# EAGLE board CT_schematic (EAGLE 7.6.0)

Size 100 x 80 mm. Coordinates in mm from the lower left corner, seen from the top.
Outline: 0,0 100,0 100,80 0,80 0,0
Copper layers (1*16): Top 0.035mm / dielectric 1.5mm / Bottom 0.035mm
Design rules "default": minimum track width 10mil, minimum drill 24mil, track to track 8mil, track to pad 8mil, pad to pad 8mil, via to via 8mil, smd to smd 8mil, copper to edge 40mil, drill to drill 8mil, minimum pad ring 10mil, minimum via ring 8mil, stop-mask expansion 4mil, vias tented up to drill 0mil, thermal gap 10mil

## Footprints (pad centres in the part's own frame; a part is rotated, then mirrored left to right if it is on the bottom)
C0603 = smd 0.8 x 0.8: 1 -0.762,0; 2 0.762,0
C0402 = smd 0.5 x 0.5: 1 -0.508,0; 2 0.508,0
C1206 = smd 1.3 x 1.6: 1 -1.524,0; 2 1.524,0
C1210 = smd 1.2 x 2.5: 1 -1.524,0; 2 1.524,0
EXV-9H = smd 3.505 x 1.676: 1 -2.857,0; 2 2.857,0
L0603 = smd 0.8 x 0.8: 1 -0.762,0; 2 0.762,0
PJ-037B_PACKAGE = drill 3.7 square: 1 12,0 | drill 3.2 square: 2 6,0
R0603 = smd 0.8 x 0.8: 1 -0.762,0; 2 0.762,0
UFQFPN48 = smd 0.559 x 0.305: 1 -3.375,2.751; 2 -3.375,2.251; 3 -3.375,1.75; 4 -3.375,1.25; 5 -3.375,0.75; 6 -3.375,0.25; 7 -3.375,-0.25; 8 -3.375,-0.75; 9 -3.375,-1.25; 10 -3.375,-1.75; 11 -3.375,-2.251; 12 -3.375,-2.751; 25 3.375,-2.751; 26 3.375,-2.251; 27 3.375,-1.75; 28 3.375,-1.25; 29 3.375,-0.75; 30 3.375,-0.25; 31 3.375,0.25; 32 3.375,0.75; 33 3.375,1.25; 34 3.375,1.75; 35 3.375,2.251; 36 3.375,2.751 | smd 0.305 x 0.559: 13 -2.751,-3.375; 14 -2.251,-3.375; 15 -1.75,-3.375; 16 -1.25,-3.375; 17 -0.75,-3.375; 18 -0.25,-3.375; 19 0.25,-3.375; 20 0.75,-3.375; 21 1.25,-3.375; 22 1.75,-3.375; 23 2.251,-3.375; 24 2.751,-3.375; 37 2.751,3.375; 38 2.251,3.375; 39 1.75,3.375; 40 1.25,3.375; 41 0.75,3.375; 42 0.25,3.375; 43 -0.25,3.375; 44 -0.75,3.375; 45 -1.25,3.375; 46 -1.75,3.375; 47 -2.251,3.375; 48 -2.751,3.375 | smd 5.588 x 5.588: 49 0,0
SSOP-28 = smd 1.5 x 0.4: 1 -3.625,4.225; 2 -3.625,3.575; 3 -3.625,2.925; 4 -3.625,2.275; 5 -3.625,1.625; 6 -3.625,0.975; 7 -3.625,0.325; 8 -3.625,-0.325; 9 -3.625,-0.975; 10 -3.625,-1.625; 11 -3.625,-2.275; 12 -3.625,-2.925; 13 -3.625,-3.575; 14 -3.625,-4.225; 15 3.625,-4.225; 16 3.625,-3.575; 17 3.625,-2.925; 18 3.625,-2.275; 19 3.625,-1.625; 20 3.625,-0.975; 21 3.625,-0.325; 22 3.625,0.325; 23 3.625,0.975; 24 3.625,1.625; 25 3.625,2.275; 26 3.625,2.925; 27 3.625,3.575; 28 3.625,4.225
182-009-MALE = drill 1.194 pad 1.524 octagon: 1 -5.537,10.923; 2 -2.769,10.923; 3 0,10.923; 4 2.769,10.923; 5 5.537,10.923; 6 -4.153,8.08; 7 -1.384,8.08; 8 1.384,8.08; 9 4.153,8.08 | hole 3.048: -12.446,9.501; 12.446,9.501
ASEK = smd 1.4 x 1: 1 -1.1,-0.8; 2 1.1,-0.8; 3 1.1,0.8; 4 -1.1,0.8
ASFL1 = smd 1.7 x 1.5: 1 -1.27,-1.1; 2 1.27,-1.1; 3 1.27,1.1; 4 -1.27,1.1
WSON-8 = smd 0.3 x 0.6: 1 -0.75,0; 2 0.05,0; 3 0.85,0; 4 1.65,0; 5 1.65,3.8; 6 0.85,3.8; 7 0.05,3.8; 8 -0.75,3.8 | smd 3 x 2.6: PAD 0.45,1.9
SON-6 = smd 0.55 x 0.3: 1 -0.355,0.5 | smd 0.52 x 0.3: 2 -0.37,0; 3 -0.37,-0.5; 4 0.37,-0.5; 5 0.37,0; 6 0.37,0.5
SW_4-1437565-2 = smd 1.4 x 2.1: 1 -2.23,4.55; 2 -2.23,-4.55; 3 2.23,4.55; 4 2.23,-4.55
LGM67K-G1J2-24-Z = smd 0.8 x 1.4: A -2,0; C 0,0
NC7SZ125M5X = smd 1.3 x 0.7: 1 -1.3,0.95; 2 -1.3,0; 3 -1.3,-0.95; 4 1.3,-0.95; 5 1.3,0.95
DUMMY_PACKAGE_100 = drill 0.3: 1 0,-1; 2 1.5,-1; 3 3,-1

## Placement (x,y rotation side)
C1  1e-06  [C0603]  -58.42,55.88 0 top  (outside the outline)
C2  1e-07  [C0603]  -62.23,55.88 0 top  (outside the outline)
C3  1e-07  [C0603]  -66.04,55.88 0 top  (outside the outline)
C4  1e-07  [C0603]  -15.24,60.96 0 top  (outside the outline)
C5  4.7e-06  [C0603]  -54.61,55.88 0 top  (outside the outline)
C6  1e-07  [C0603]  -19.05,60.96 0 top  (outside the outline)
C7  1e-08  [C0603]  -22.86,60.96 0 top  (outside the outline)
C8  1e-06  [C0603]  -26.67,60.96 0 top  (outside the outline)
C9  1e-07  [C0402]  -57.15,60.96 0 top  (outside the outline)
C10  1e-07  [C0402]  -60.96,60.96 0 top  (outside the outline)
C11  1e-07  [C0402]  -64.77,60.96 0 top  (outside the outline)
C12  1e-07  [C0402]  -15.24,66.04 0 top  (outside the outline)
C13  1e-07  [C0402]  -19.05,66.04 0 top  (outside the outline)
C14  1e-08  [C0402]  -22.86,66.04 0 top  (outside the outline)
C15  1e-08  [C0402]  -26.67,66.04 0 top  (outside the outline)
C16  1e-08  [C0402]  -30.48,66.04 0 top  (outside the outline)
C17  1e-05  [C1206]  -57.15,48.26 0 top  (outside the outline)
C18  1e-05  [C1210]  -50.8,48.26 0 top  (outside the outline)
C19  1e-07  [C0402]  -34.29,66.04 0 top  (outside the outline)
C20  0.0001  [EXV-9H]  -17.78,49.53 0 top  (outside the outline)
C21  0.0001  [EXV-9H]  -29.21,49.53 0 top  (outside the outline)
C22  1e-08  [C0402]  -38.1,66.04 0 top  (outside the outline)
F1  240.0  [L0603]  -30.48,60.96 0 top  (outside the outline)
J1  PJ-037B  [PJ-037B_PACKAGE]  -27.94,29.21 0 top  (outside the outline)
R1  10000.0  [R0603]  -35.56,55.88 0 top  (outside the outline)
R2  1000.0  [R0603]  -34.29,60.96 0 top  (outside the outline)
R3  1600.5  [R0603]  -38.1,60.96 0 top  (outside the outline)
R4  4700.0  [R0603]  -41.91,60.96 0 top  (outside the outline)
R5  10000.0  [R0603]  -40.64,55.88 0 top  (outside the outline)
R6  100000.0  [R0603]  -15.24,55.88 0 top  (outside the outline)
R7  100000.0  [R0603]  -20.32,55.88 0 top  (outside the outline)
R8  2231.0  [R0603]  -45.72,60.96 0 top  (outside the outline)
R9  1000.0  [R0603]  -49.53,60.96 0 top  (outside the outline)
R10  10000.0  [R0603]  -45.72,55.88 0 top  (outside the outline)
R11  10000.0  [R0603]  -50.8,55.88 0 top  (outside the outline)
R12  9100.0  [R0603]  -53.34,60.96 0 top  (outside the outline)
R13  680000.0  [R0603]  -25.4,55.88 0 top  (outside the outline)
R14  120000.0  [R0603]  -30.48,55.88 0 top  (outside the outline)
U1  stm32f051c4u7  [UFQFPN48]  -17.78,40.64 0 top  (outside the outline)
U2  ST3241EBPR  [SSOP-28]  -58.42,7.62 0 top  (outside the outline)
U3  182-009-113R531  [182-009-MALE]  -36.83,6.35 0 top  (outside the outline)
U4  ASEK-32.768KHz-ECST  [ASEK]  -57.15,40.64 0 top  (outside the outline)
U5  ASFL1-25MHZ-NCS  [ASFL1]  -36.83,40.64 0 top  (outside the outline)
U6  LP3878SDX-ADJ/NOPB  [WSON-8]  -66.04,25.4 0 top  (outside the outline)
U7  TPS3895ADRYR  [SON-6]  -46.99,64.77 0 top  (outside the outline)
U8  4-1437565-2  [SW_4-1437565-2]  -44.45,27.94 0 top  (outside the outline)
U9  Q65110A2395  [LGM67K-G1J2-24-Z]  -39.37,48.26 0 top  (outside the outline)
U10  nc7sz125m5x  [NC7SZ125M5X]  -62.23,46.99 0 top  (outside the outline)
U11  Dummy  [DUMMY_PACKAGE_100]  -44.45,66.04 0 top  (outside the outline)

## Library data of the parts
C1-C22 F1 J1 R1-R14 U1-U11 = circuit_tree

## Nets
CLK_U1_3: U1.3 U4.3
CLK_U1_5: U1.5 U5.3
GND: C1.2 C2.2 C3.2 C4.2 C5.2 C6.2 C7.2 C8.2 C9.2 C12.2 C13.2 C14.2 C15.2 C16.2 C17.2 C18.2 C19.2 C20.2 C21.2 C22.2 J1.2 R2.2 R5.2 R9.2 R12.2 R14.2 U1.8 U1.23 U1.47 U1.49 U2.23 U2.25 U3.5 U4.2 U5.2 U6.3 U6.PAD U7.2 U9.C U10.1 U10.3 U11.1
NET_U1_7: R4.1 U1.7 U10.4
NET_U1_9: C7.1 C8.1 F1.1 U1.9
NET_U1_44: R5.1 U1.44
NET_U1_45: R3.1 U1.45 U9.A
NET_U1_46: R1.1 U1.46 U8.3 U8.4
NET_U2_1: C11.1 U2.1
NET_U2_2: C11.2 U2.2
NET_U2_3: C13.1 U2.3
NET_U2_22: R6.1 U2.22
NET_U2_24: C10.2 U2.24
NET_U2_27: C12.1 U2.27
NET_U2_28: C10.1 U2.28
NET_U3_2: U2.4 U3.2
NET_U3_3: U2.9 U3.3
NET_U3_7: U2.5 U3.7
NET_U3_8: U2.10 U3.8
NET_U6_1: C16.1 U6.1
NET_U6_6: R8.2 R9.1 U6.6
NET_U6_8: R7.1 U6.8
NET_U7_1: R11.1 R12.1 U7.1
NET_U7_3: R13.2 R14.1 U7.3
NET_U7_4: R10.1 U7.4 U10.2
NET_U8_1: R2.1 U8.1 U8.2
PROC_ADC_IN0: U1.10 U11.2
PROC_ADC_IN1: U1.11 U11.3
PROC_USART1_CTS: U1.32 U2.13
PROC_USART1_RTS: U1.33 U2.18
PROC_USART1_RX: U1.31 U2.19
PROC_USART1_TX: U1.30 U2.14
VCC_S1_10V4: C17.1 C20.1 C21.1 J1.1 R7.2 U6.4
VCC_TIER1_3V3: C1.1 C2.1 C3.1 C4.1 C5.1 C6.1 C9.1 C14.1 C15.1 C18.1 C19.1 C22.1 F1.2 R1.2 R3.2 R4.2 R6.2 R8.1 R10.2 R11.2 R13.1 U1.1 U1.24 U1.48 U2.26 U4.4 U5.4 U6.5 U7.6 U10.5

## Tracks (layer width: path | path; a pad name or v marks a point on that pad's centre or on a via)
CLK_U1_3  (1 unrouted)
CLK_U1_5  (1 unrouted)
GND  (41 unrouted)
NET_U1_7  (2 unrouted)
NET_U1_9  (3 unrouted)
NET_U1_44  (1 unrouted)
NET_U1_45  (2 unrouted)
NET_U1_46  (3 unrouted)
NET_U2_1  (1 unrouted)
NET_U2_2  (1 unrouted)
NET_U2_3  (1 unrouted)
NET_U2_22  (1 unrouted)
NET_U2_24  (1 unrouted)
NET_U2_27  (1 unrouted)
NET_U2_28  (1 unrouted)
NET_U3_2  (1 unrouted)
NET_U3_3  (1 unrouted)
NET_U3_7  (1 unrouted)
NET_U3_8  (1 unrouted)
NET_U6_1  (1 unrouted)
NET_U6_6  (2 unrouted)
NET_U6_8  (1 unrouted)
NET_U7_1  (2 unrouted)
NET_U7_3  (2 unrouted)
NET_U7_4  (2 unrouted)
NET_U8_1  (2 unrouted)
PROC_ADC_IN0  (1 unrouted)
PROC_ADC_IN1  (1 unrouted)
PROC_USART1_CTS  (1 unrouted)
PROC_USART1_RTS  (1 unrouted)
PROC_USART1_RX  (1 unrouted)
PROC_USART1_TX  (1 unrouted)
VCC_S1_10V4  (5 unrouted)
VCC_TIER1_3V3  (29 unrouted)